# Altium PCB PCB.this.PcbDoc
Units mil, origin at the board's own origin, x right, y up, seen from the top; angles counter-clockwise.
Board outline 2580 x 1190 mil, 2 copper layers (Top Layer, Bottom Layer); 22 components, 15 nets, 63 pads, 18 vias.
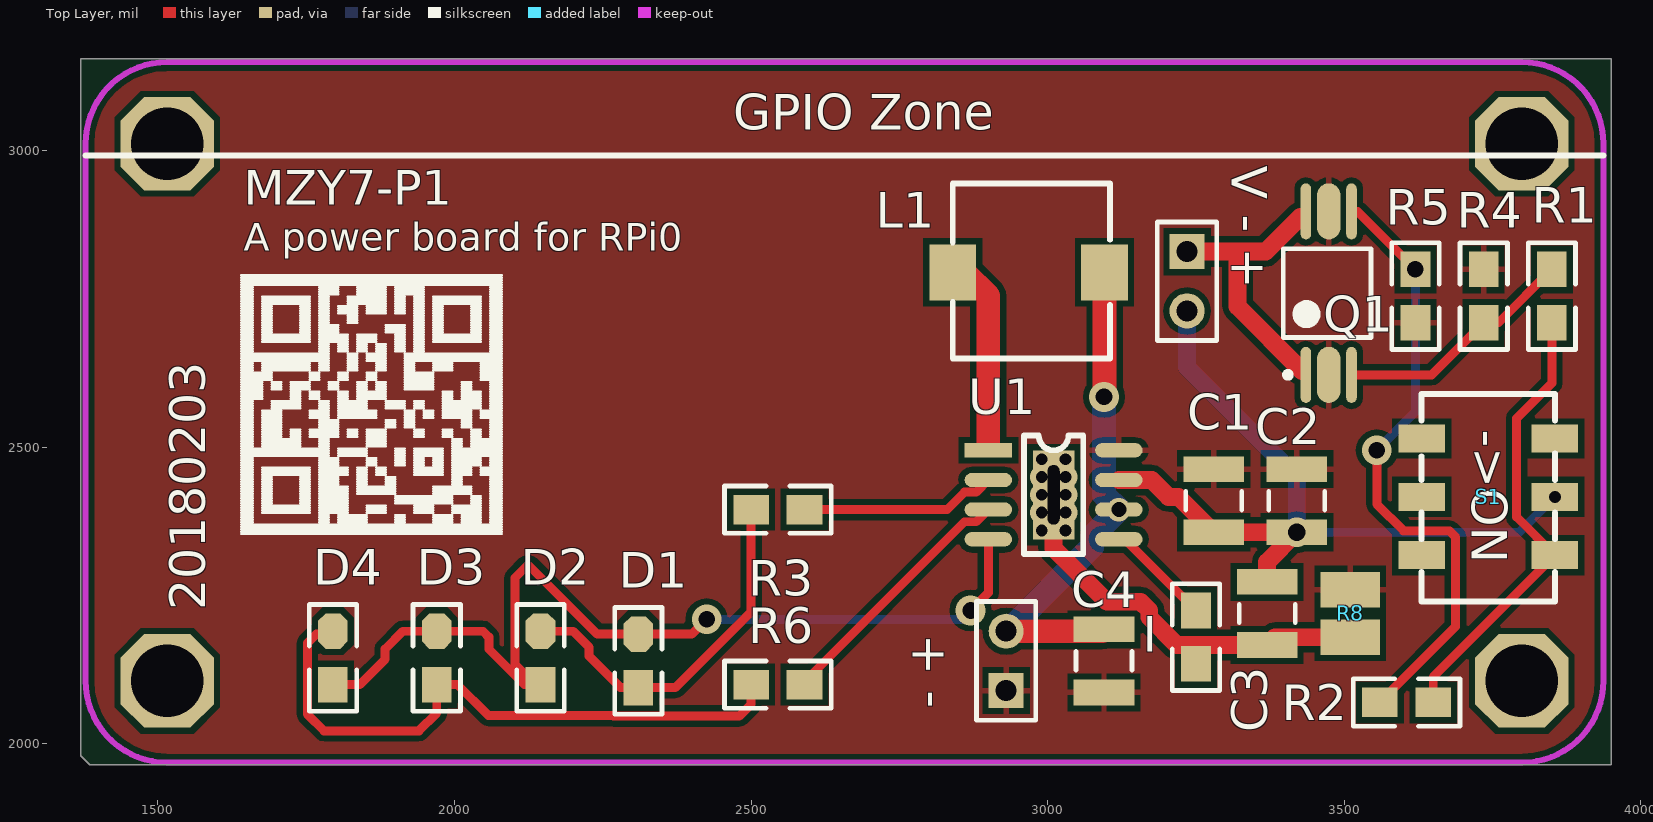
[diagram p0: Top Layer view]
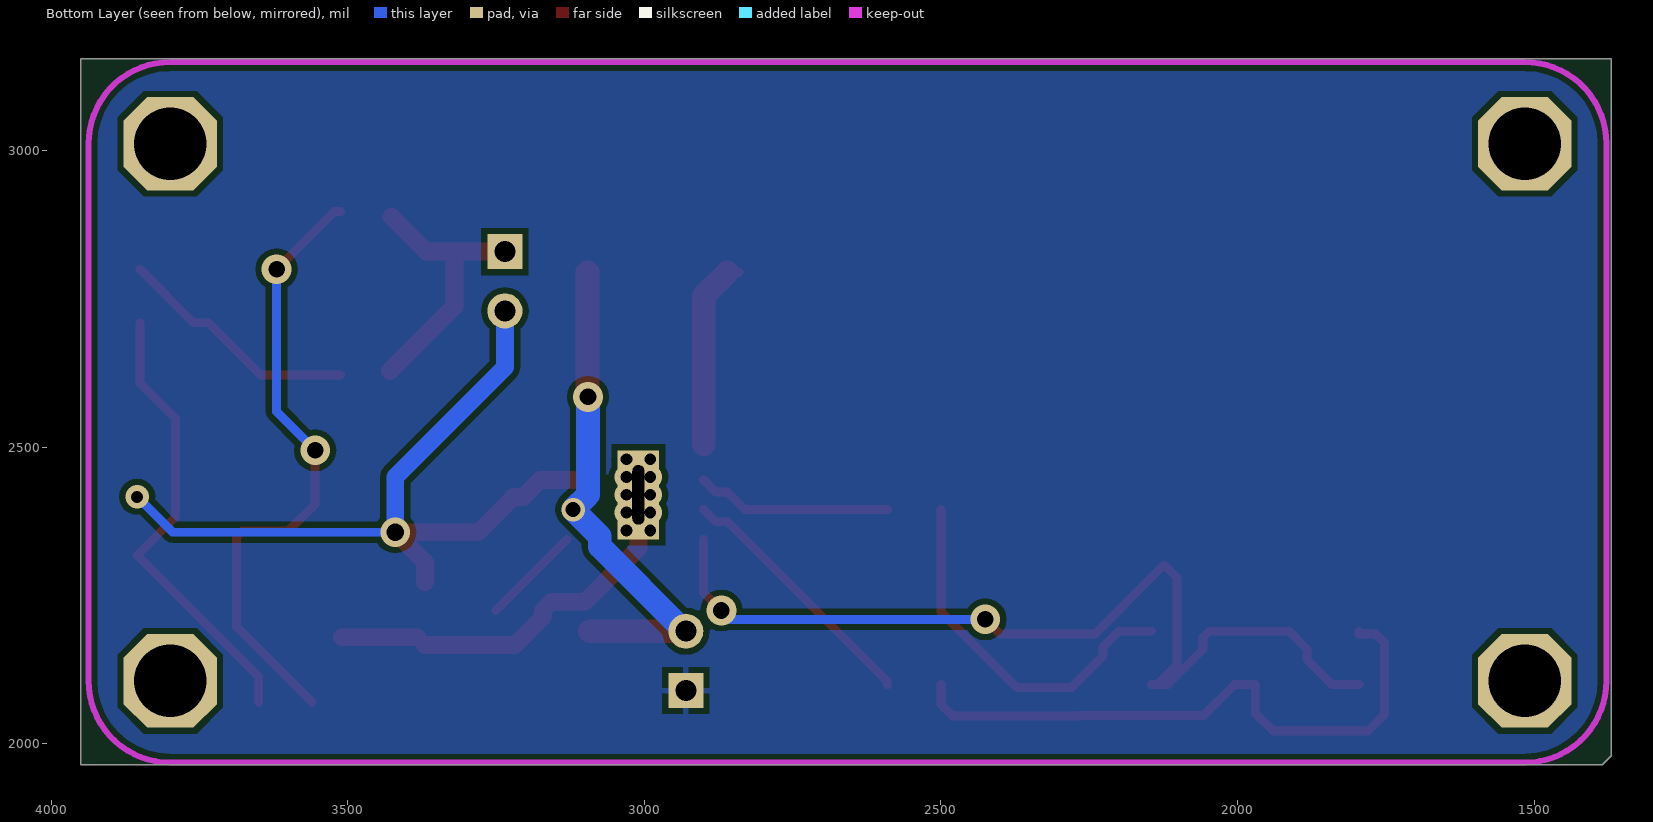
[diagram p1: Bottom Layer view, seen from below]

## Layer stack, top to bottom
Top Layer: signal copper 1.4
Dielectric: dielectric 12.6, FR-4, Dk 4.8
Bottom Layer: signal copper 1.4

## Board outline
1370,3155 3950,3155 3950,1965 1385,1965 1370,1980 1370,3150

## Design rules (kind name [scope] priority, off if disabled: settings)
Clearance [All] p1: gap=10
PolygonConnect [All] p1: connectstyle=Relief reliefconductorwidth=10 reliefentries=4 polygonreliefangle="90 Angle"
RoutingVias [All] p1: holewidth=28 width=50 viastyle="Through Hole" minholewidth=28 minwidth=50 maxholewidth=28 maxwidth=50
SilkscreenOverComponentPads [All] p1: minsilkscreentomaskgap=10
SolderMaskExpansion [All] p1: expansion=4
Width [All] p1: maxlimit=50 minlimit=10 preferedwidth=15
27 further rules are at their usual default settings.

## Components (designator, comment, footprint, x,y, rotation, side; value= is the part's Value field where it differs from the comment)
"- +" "BATInterface" HDR1X2 2930,2090 r90 top (schematic designator P2)
C1 "C1210" C1210 3280,2410 r270 top
C2 "C1210" C1210 3420,2410 r270 top
C3 "1210" C1210 3370,2220 r90 top
C4 "1210" C1210 3095,2140 r90 top
D1 "LED1" 0805D 2310,2095 r90 top
D2 "LED2" 0805D 2145,2100 r90 top
D3 "LED3" 0805D 1970,2100 r90 top
D4 "LED4" 0805D 1795,2100 r90 top
I "Res3" 0805 3250,2135 r90 top (schematic designator R7)
L1 "Inductor Iron" L_7x7 2840,2795 r90 top
Q1 "8205A" TSSOP8 3525,2760 r90 top
R1 "Res3" 0805 3850,2710 r90 top
R2 "Res3" 0805 3650,2070 r180 top
R3 "Res3" 0805 2500,2395 r0 top
R4 "Res3" 0805 3735,2710 r90 top
R5 "Res3" 0805 3620,2710 r90 top
R6 "Res3" 0805 2500,2100 r0 top
R8 "FlyLine" PFL1 3510,2180 r90 top
S1 "SW-SPST" MSS22D18 3855,2515 r270 top
U1 "ETA9740" SO-8H 2900,2495 r0 top
"V - +" "5V" HDR1X2 3235,2830 r270 top (schematic designator P1)

## Footprints (in the part's own frame and the unit in brackets; to place one, negate y for a bottom-side part, rotate by r counter-clockwise, add the part's x,y. Pads: shape width x height; smd on the part's side, far side on the other; paste and mask are expansions set on the pad)
0805 [mil]
  rect 60x50 smd: 1(0,0) 2(90,0)
  silkscreen extent -45,-40 135,40
0805D [mil]
  rect 60x50 smd: 1(0,0)
  oct 60x50 smd: 2(90,0)
  silkscreen extent -45,-40 135,40
C1210 [mm] "Chip Capacitor, Body 3.2x2.5mm, IPC High Density"
  rect 1.1x2.6 smd: 1(-1.35,0) 2(1.35,0)
  silkscreen extent -0.4,-1.2 0.4,1.2, body extent -1.7,-1.35 1.7,1.35, height 1.3
HDR1X2 [mm] "Connector; Header; 2 Position"
  rect 1.5x1.5 hole 0.9: 1(0,0)
  round 1.5 hole 0.9: 2(2.54,0)
  silkscreen extent -1.27,-1.27 3.81,1.27
L_7x7 [mm]
  rect 2.4x2 smd: 1(0,0) 2(0,-6.5)
  silkscreen extent -3.68,-6.73 3.81,0
MSS22D18 [mm] "a switch"
  rect 1.2x2 smd: 1(2.5,0) 1(2.5,-5.7) 2(5,0) 2(5,-5.7) 3(0,0) 3(0,-5.7)
  silkscreen extent -1.91,-5.71 6.99,0
PFL1 [mil]
  rect 60x100 smd: 1(0,0) 2(80,0)
SO-8H [mil]
  rect 80x24 smd: 1(0,0)
  oval 80x24 smd: 2(0,-50) 3(0,-100) 4(0,-150) 5(220,-150) 6(220,-100) 7(220,-50) 8(220,0)
  rect 70x150 hole 20 slot 100 at 90 deg: 9(110,-75)
  silkscreen extent 60,-175 160,25
TSSOP8 [mm]
  oval 2.4x0.45 smd: 1(-3.5,2.275) 4(-3.5,0.325) 5(3.5,0.325) 8(3.5,2.275)
  oval 2.4x1 smd: 2(-3.5,1.3) 7(3.5,1.3)
  silkscreen extent -3.62,-0.51 1.9,3.25, body extent -2.7,-0.51 2.7,3.25, height 2

## Part data
"- +": library part "Header 2H", "Header, 2-Pin, Right Angle"
C1 C2 C3 C4: library part Cap, "Capacitor"
D1 D3 D4: library part LED2, "Typical RED, GREEN, YELLOW, AMBER GaAs LED"
D2: "Typical RED, GREEN, YELLOW, AMBER GaAs LED"
L1: "Magnetic-Core Inductor"
R8: library part Res3, "JP"
S1: "Single-Pole, Single-Throw Switch"
"V - +": library part "Header 2", "Header, 2-Pin"

## Free pads (board coordinates)
  oct 157.48x157.48 hole 122.05: 0(1515.75,2106.3) 0(1515.75,3011.81) 0(3799.21,2106.3) 0(3799.21,3011.81)

## Via types
v1: diameter 40, hole 20, Top Layer to Bottom Layer, 7 vias
v2: diameter 50, hole 28, Top Layer to Bottom Layer, 5 vias
v3: diameter 30, hole 20, Top Layer to Bottom Layer, 4 vias
v4: diameter 40, hole 25, Top Layer to Bottom Layer, 1 vias
v5: diameter 50, hole 30, Top Layer to Bottom Layer, 1 vias

## Nets (pads, with @x,y where several pads share a name; then routed paths per layer and width w, separated by ;. In a path a pad name is that pad's centre, name@x,y a point inside that pad or via, vN(x,y) a via of type N, cw(c..) or ccw(c..) an arc to the next point about the centre after c; other vN are vias at no path point)
GND: "- +.1" C1.1 C2.1 C4.1 Q1.2 Q1.7 R4.2 R5.1 R8.2 U1.8
NetC1_2: "V - +.2" C1.2 C2.2 C3.2 S1.1@3855,2416.57 U1.7 | length 1350.4
  Top Layer w30: U1.7 3175.32,2445 3203.82,2416.5 3220.35,2416.5 C1.2 v5(3420,2356.85) 3370,2306.85 C3.2
  Bottom Layer w15: v5(3420,2356.85) 3795.28,2356.85 v1(3855,2416.57)
  Bottom Layer w30: 3235,2730 3235,2635 3420,2450 v5(3420,2356.85)
NetC3_1: C3.1 I.1 R8.1 U1.9 | length 651.3
  Top Layer w30: U1.9 3010,2330 3100.2,2239.8 3156.54,2239.8 3171.18,2225.16 3171.18,2213.46 3217.79,2166.85 C3.1 ; C3.1@3383.15,2180 R8.1
  other v1: 2990,2390 3030,2390 2990,2420 3030,2420 2990,2450 3030,2450
  other v3: 2990,2360 3030,2360 2990,2480 3030,2480
NetC4_2: "- +.2" C4.2 L1.2 U1.6 | length 857.7
  Top Layer w40: 2930,2190 C4.2@3091.85,2190 ; v2(3095,2585) 3095.91,2585.91 L1.2
  Bottom Layer w40: 2930,2190 2932.43,2190 3075,2332.57 3075,2350 v4(3120,2395) 3095,2420 v2(3095,2585)
NetD1_1: D1.1 D2.2 R3.1 | length 628.2
  Top Layer w15: D2.2 2200,2190 2227,2163 2227,2148 2280,2095 D1.1 2372,2095 2500,2223 R3.1
NetD1_2: D1.2 D2.1 D3.2 D4.1 U1.4 | length 1613.2
  Top Layer w15: D4.1 1840,2100 1883,2143 1883,2160 1913,2190 D3.2 2048,2190 2058,2180 2058,2160 2118,2100 D2.1@2136,2100 ; D2.1 D2.1@2136,2100 ; v2(2425,2210) 2400,2185 D1.2 2241,2185 2126,2300 2122,2300 2102,2280 2102,2134 D2.1@2136,2100 ; v2(2870,2225) 2900,2255 U1.4
  Bottom Layer w15: v2(2425,2210) 2855,2210 v2(2870,2225)
NetD3_1: D3.1 D4.2 R6.1 | length 1057.5
  Top Layer w15: D4.2 1795,2185 1767,2185 1752,2170 1752,2050 1780,2022 1940,2022 1970,2052 D3.1 2005,2100 2057,2048 2267,2048 2268,2047 2480,2047 2500,2067 R6.1
NetL1_1: L1.1 U1.1 | length 326.6
  Top Layer w15: L1.1 L1.1@2860,2795
  Top Layer w40: L1.1@2860,2795 2900,2755 U1.1@2900,2505
NetP1_1: "V - +.1" Q1.1 Q1.8 | length 461.9
  Top Layer w30: 3235,2830 3320,2830 ; 3426.32,2888.68 3367.64,2830 3320,2830 ; Q1.1@3428.82,2628.82 3320,2737.64 3320,2830
NetQ1_4: Q1.4 R1.2 R4.1 | length 411.4
  Top Layer w15: Q1.4 3647.2,2622.2 R4.1 3760,2710 R1.2
NetQ1_5: Q1.5 R2.2 R5.2 | length 1058
  Top Layer w15: Q1.5 3522.2,2897.8 v2(3620,2800) ; v2(3555,2495) 3555,2404.42 3600.15,2359.27 3677.21,2359.27 3687.46,2349.02 3687.46,2197.46 R2.2
  Bottom Layer w15: v2(3555,2495) 3620,2560 v2(3620,2800)
NetR1_1: R1.1 R2.1 S1.2@3855,2318.15 | length 776.2
  Top Layer w15: R2.1 3650,2113.15 3855,2318.15 3790.63,2382.52 3790.63,2548.98 3850,2608.35 R1.1
NetR3_2: R3.2 U1.2 | length 330.7
  Top Layer w15: R3.2 2830.28,2395 2859.78,2424.5 2879.5,2424.5 U1.2
NetR6_2: R6.2 U1.3 | length 435
  Top Layer w15: R6.2 2590,2104.72 2859.78,2374.5 2879.5,2374.5 U1.3
NetR7_2: I.2 U1.5 | length 169.7
  Top Layer w15: U1.5@3130,2345 I.2
pads on no net: S1.1@3630.59,2416.57 S1.2@3630.59,2318.15 S1.3

## Polygon pours and split planes (outlines as drawn)
GND on Bottom Layer "Bottom Layer-No Net" (solid, remove dead copper, pour order 2): 1345,3255 1350,3260 4045,3260 4045,1850 4040,1845 4035,1850 1210,1850
GND on Top Layer "Bottom Layer-No Net" (solid, remove dead copper, pour order 3): 1175,3290 1225,3240 4125,3240 4125,1875 4100,1850 4075,1825 1240,1825

## Keep-outs
Keep-Out Layer:
  lines w10: 1377.95,2106.3 ccw(c1515.75,2106.3) 1515.75,1968.5 3799.21,1968.5 ccw(c3799.21,2106.3) 3937.01,2106.3 3937.01,3011.81 ccw(c3799.21,3011.81) 3799.21,3149.61 1515.75,3149.61 ccw(c1515.75,3011.81) 1377.95,3011.81 1377.95,2106.3

## Silkscreen, mask and mechanical layers (free items; w line width, h text height)
Top Overlay:
  drawing of 767 lines, arcs and shapes, not listed
  text "GPIO Zone" at 2470,3035 h60
  text "MZY7-P1" at 1645,2890 h100
  text "A power board for RPi0" at 1645,2815 h80
  text "20180203" at 1580,2225 h60 r90

## Text inside footprints (layer, text, board x,y; h text height)
S1: Top Overlay "->ON" at 3715,2530 h60 r270